# EAGLE board pixelAdapter_f103c8 pro-Panel (EAGLE 9.5.2), part 1 of 2
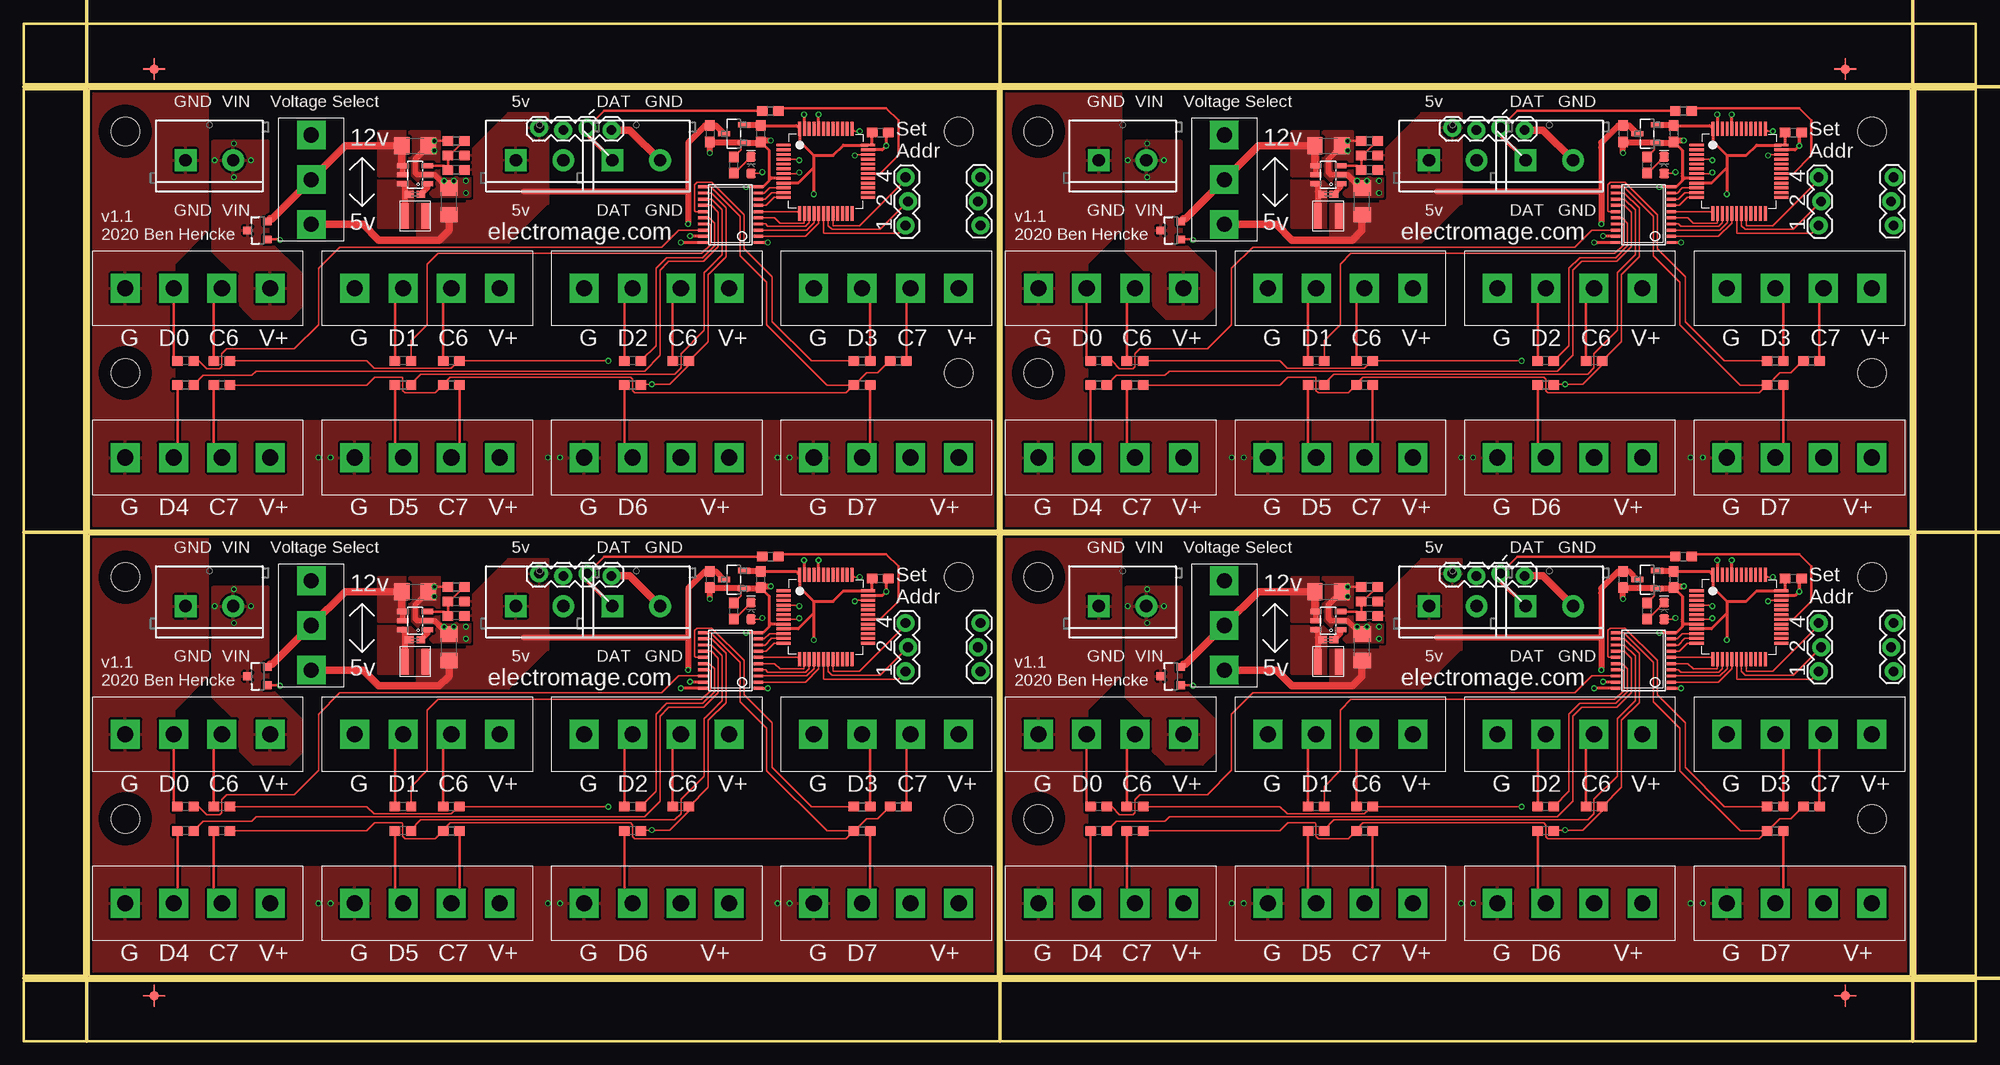
[diagram p0: board, top side]
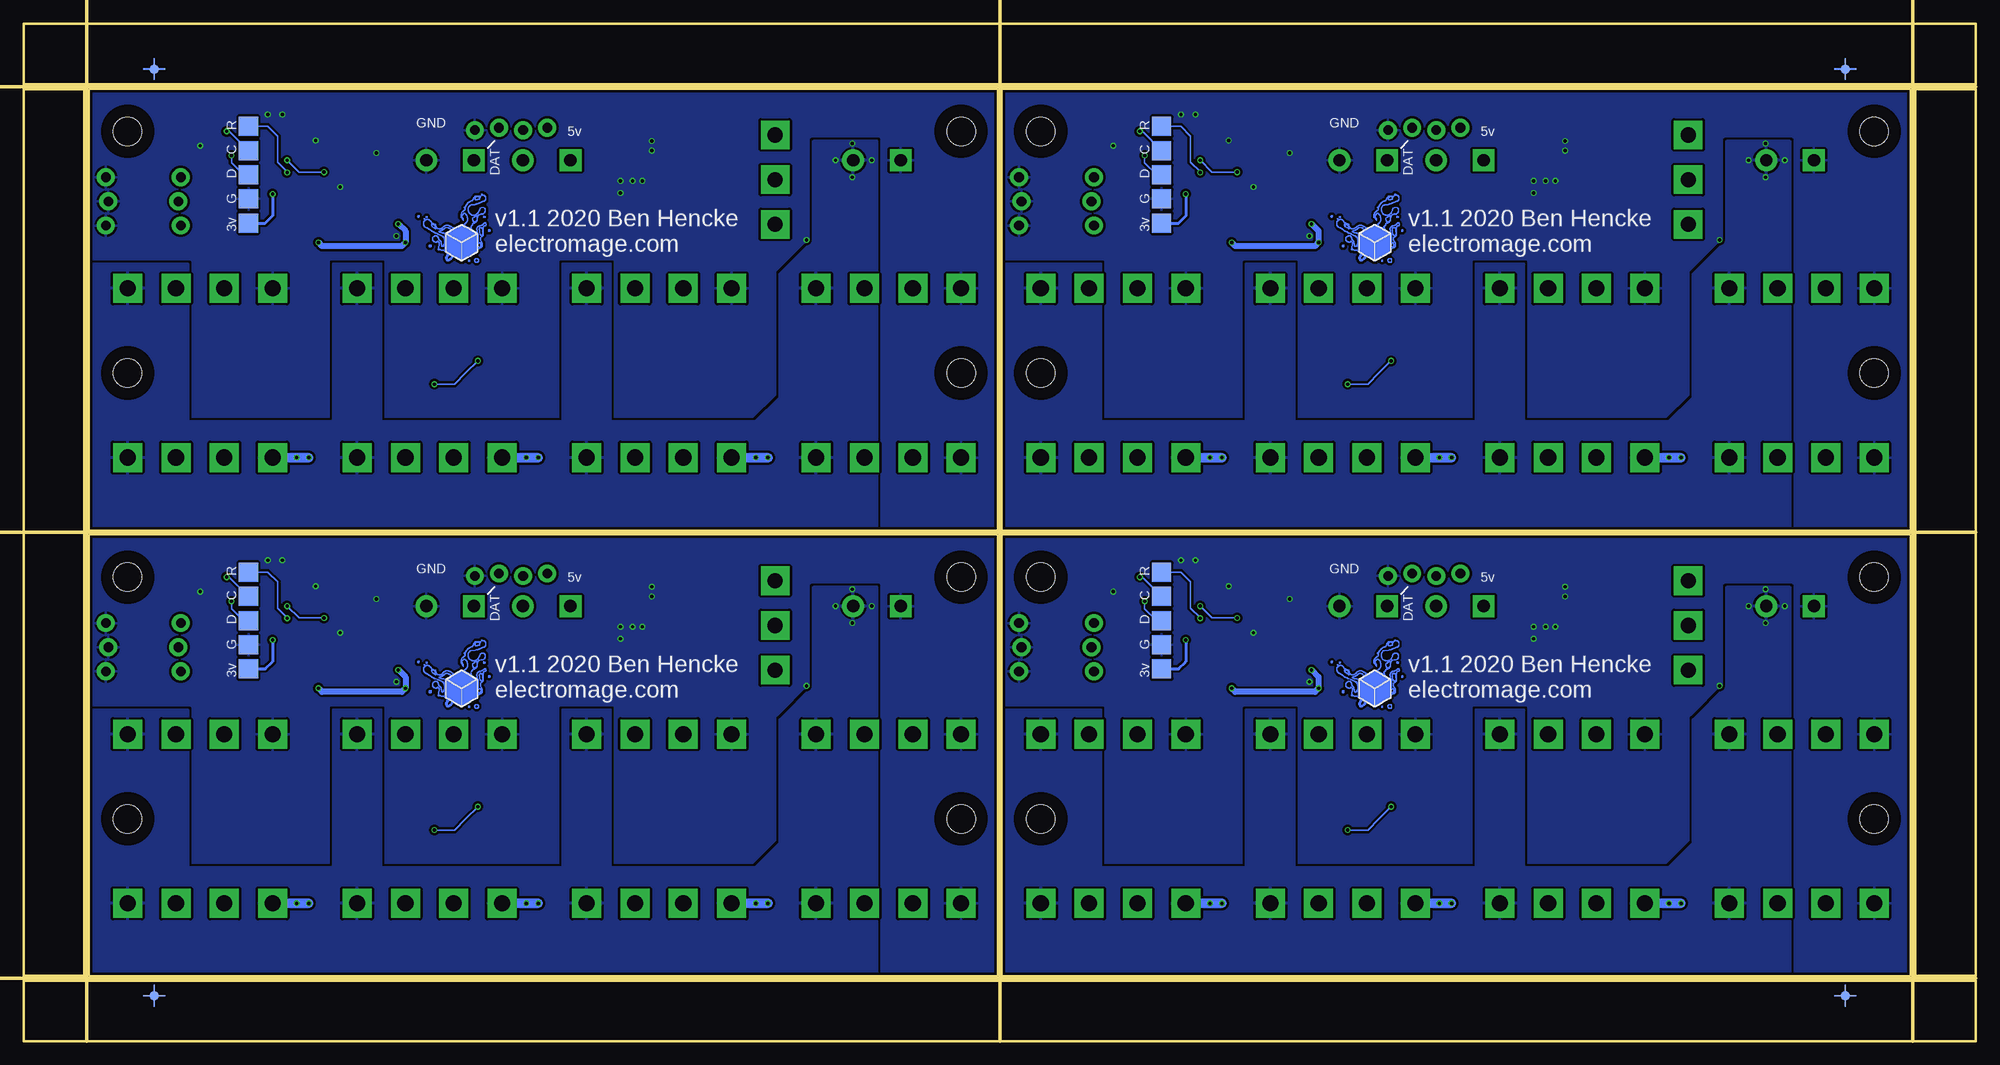
[diagram p1: board, bottom side, seen from below]

Size 205.23 x 106.93 mm. Coordinates in mm from the lower left corner, seen from the top.
Outline: 6.86,6.86 102.36,6.86 102.36,53.21 6.86,53.21 6.86,6.86
Outline: 102.87,6.86 198.37,6.86 198.37,53.21 102.87,53.21 102.87,6.86
Outline: 6.86,53.72 102.36,53.72 102.36,100.08 6.86,100.08 6.86,53.72
Outline: 102.87,53.72 198.37,53.72 198.37,100.08 102.87,100.08 102.87,53.72
Outline: 0,6.35 205.23,6.35 205.23,0 0,0 0,6.35
Outline: 198.88,100.08 205.23,100.08 205.23,6.86 198.88,6.86 198.88,100.08
Outline: 0,106.93 205.23,106.93 205.23,100.58 0,100.58 0,106.93
Outline: 0,100.08 6.35,100.08 6.35,6.86 0,6.86 0,100.08
Copper layers (1*16): Top 0.035mm / dielectric 1.5mm / Bottom 0.035mm
Design rules "SparkFun-2-layer-FAB-LIMIT *": minimum track width 4mil, minimum drill 6mil, track to track 4mil, track to pad 4mil, pad to pad 4mil, via to via 4mil, smd to smd 4mil, copper to edge 4mil, drill to drill 4mil, minimum pad ring 5mil, minimum via ring 5mil, stop-mask expansion 1mil, vias tented up to drill 25mil, thermal gap 10mil
Holes 3 mm at 10.67,23.37 98.3,23.37 10.67,48.77 98.3,48.77 106.68,23.37 194.31,23.37 106.68,48.77 194.31,48.77 10.67,70.23 98.3,70.23 10.67,95.63 98.3,95.63 106.68,70.23 194.31,70.23 106.68,95.63 194.31,95.63
tRestrict: area 9.4,22.1 to 11.9,24.6; area 9.4,47.5 to 11.9,50; area 97,47.5 to 99.6,50; area 97,22.1 to 99.6,24.6; area 105.4,22.1 to 108,24.6; area 105.4,47.5 to 108,50; area 193,47.5 to 195.6,50; area 193,22.1 to 195.6,24.6; area 9.4,69 to 11.9,71.5; area 9.4,94.4 to 11.9,96.9; area 97,94.4 to 99.6,96.9; area 97,69 to 99.6,71.5; 4 more areas
bRestrict: area 9.4,22.1 to 11.9,24.6; area 9.4,47.5 to 11.9,50; area 97,47.5 to 99.6,50; area 97,22.1 to 99.6,24.6; area 105.4,22.1 to 108,24.6; area 105.4,47.5 to 108,50; area 193,47.5 to 195.6,50; area 193,22.1 to 195.6,24.6; area 9.4,69 to 11.9,71.5; area 9.4,94.4 to 11.9,96.9; area 97,94.4 to 99.6,96.9; area 97,69 to 99.6,71.5; 4 more areas
Milling: 6 lines

## Footprints (pad centres in the part's own frame; a part is rotated, then mirrored left to right if it is on the bottom)
0603 = smd 1.1 x 1: 1 -0.85,0; 2 0.85,0
1206 = smd 1.6 x 1.8: 1 -1.4,0; 2 1.4,0
C0402K = smd 0.925 x 0.74: 1 -0.6,0; 2 0.6,0
LED-0603 = smd 1 x 1: A -0.877,0; C 0.877,0
BENSFIDUCIAL-SMALL = smd 1 x 1: 1 0,0 | smd 0.152 x 0.762: P$1 0,0.762; P$2 0,-0.762 | smd 0.762 x 0.152: P$3 0.762,0; P$4 -0.762,0
SCREWTERMINAL-5MM-2 = drill 1.3 pad 2.286 square: 1 0,0 | drill 1.3 pad 2.286: 2 5,0
1X03_LOCK = drill 1.016 pad 1.88: 1 0,0.127; 2 2.54,-0.127; 3 5.08,0.127
1X04_LOCK = drill 1.016 pad 1.88: 1 0,0.127; 2 2.54,-0.127; 3 5.08,0.127; 4 7.62,-0.127
INDUCTOR-3030 = smd 0.8 x 2.7: P$1 1.1,0; P$2 -1.1,0
SOT23-3 = smd 0.8 x 0.9: 1 -0.95,-1; 2 0.95,-1; 3 0,1.1
TP20SQ = smd 2 x 2: TP 0,0
TSSOP20 = smd 0.305 x 0.991: 1 -2.925,-2.918; 2 -2.275,-2.918; 3 -1.625,-2.918; 4 -0.975,-2.918; 5 -0.325,-2.918; 6 0.325,-2.918; 7 0.975,-2.918; 8 1.625,-2.918; 9 2.275,-2.918; 10 2.925,-2.918; 11 2.925,2.918; 12 2.275,2.918; 13 1.625,2.918; 14 0.975,2.918; 15 0.325,2.918; 16 -0.325,2.918; 17 -0.975,2.918; 18 -1.625,2.918; 19 -2.275,2.918; 20 -2.925,2.918
SOT95P237X112-3N = smd 0.559 x 1.27: 1 -0.94,-1.041; 2 0.94,-1.041; 3 0,1.041
LQFP48_7X7MM_0.5MMPP = smd 1.5 x 0.3: 1 -4.45,2.75; 2 -4.45,2.25; 3 -4.45,1.75; 4 -4.45,1.25; 5 -4.45,0.75; 6 -4.45,0.25; 7 -4.45,-0.25; 8 -4.45,-0.75; 9 -4.45,-1.25; 10 -4.45,-1.75; 11 -4.45,-2.25; 12 -4.45,-2.75; 25 4.45,-2.75; 26 4.45,-2.25; 27 4.45,-1.75; 28 4.45,-1.25; 29 4.45,-0.75; 30 4.45,-0.25; 31 4.45,0.25; 32 4.45,0.75; 33 4.45,1.25; 34 4.45,1.75; 35 4.45,2.25; 36 4.45,2.75 | smd 0.3 x 1.5: 13 -2.75,-4.45; 14 -2.25,-4.45; 15 -1.75,-4.45; 16 -1.25,-4.45; 17 -0.75,-4.45; 18 -0.25,-4.45; 19 0.25,-4.45; 20 0.75,-4.45; 21 1.25,-4.45; 22 1.75,-4.45; 23 2.25,-4.45; 24 2.75,-4.45; 37 2.75,4.45; 38 2.25,4.45; 39 1.75,4.45; 40 1.25,4.45; 41 0.75,4.45; 42 0.25,4.45; 43 -0.25,4.45; 44 -0.75,4.45; 45 -1.25,4.45; 46 -1.75,4.45; 47 -2.25,4.45; 48 -2.75,4.45
CON4-508 = drill 1.7 pad 3.048 square: 1 -7.62,0; 2 -2.54,0; 3 2.54,0; 4 7.62,0
SOT23-6 = smd 0.55 x 1.2: 1 -0.95,-1.3; 2 0,-1.3; 3 0.95,-1.3; 4 0.95,1.3; 5 0,1.3; 6 -0.95,1.3
SWITCH-XKB-SS-12D10 = drill 1.6 pad 3 square: P$1 -4.7,0; P$2 0,0; P$3 4.7,0

## Placement (x,y rotation side)
C1  1.0uF  [0603]  72.14,48.51 270 top
C2  4.7uF  [0603]  77.47,48.51 270 top
C3  0.1uF  [0603]  90.04,48.64 0 top
C4  47uF  [1206]  44.7,41.4 90 top
C5  4.7uF  [1206]  41.15,47.24 0 top
C6  0.1uF  [C0402K]  41.15,42.16 180 top
C7  22pF  [0603]  45.47,44.7 180 top
C8  0.1uF  [0603]  186.06,48.64 0 top
C9  4.7uF  [0603]  173.48,48.51 270 top
C10  4.7uF  [1206]  137.16,47.24 0 top
C11  22pF  [0603]  141.48,44.7 180 top
C12  47uF  [1206]  140.72,41.4 90 top
C13  0.1uF  [C0402K]  137.16,42.16 180 top
C14  1.0uF  [0603]  168.15,48.51 270 top
C15  0.1uF  [0603]  90.04,95.5 0 top
C16  4.7uF  [0603]  77.47,95.38 270 top
C17  4.7uF  [1206]  41.15,94.11 0 top
C18  22pF  [0603]  45.47,91.57 180 top
C19  47uF  [1206]  44.7,88.27 90 top
C20  0.1uF  [C0402K]  41.15,89.03 180 top
C21  1.0uF  [0603]  72.14,95.38 270 top
C22  0.1uF  [0603]  186.06,95.5 0 top
C23  4.7uF  [0603]  173.48,95.38 270 top
C24  4.7uF  [1206]  137.16,94.11 0 top
C25  22pF  [0603]  141.48,91.57 180 top
C26  47uF  [1206]  140.72,88.27 90 top
C27  0.1uF  [C0402K]  137.16,89.03 180 top
C28  1.0uF  [0603]  168.15,95.38 270 top
D1  [LED-0603]  172.47,45.21 90 top
D2  [LED-0603]  76.45,45.21 90 top
D3  [LED-0603]  76.45,92.08 90 top
D4  [LED-0603]  172.47,92.08 90 top
E$1  [BENSFIDUCIAL-SMALL]  13.72,102.17 0 top
E$2  [BENSFIDUCIAL-SMALL]  13.72,102.17 0 bottom
E$3  [BENSFIDUCIAL-SMALL]  191.52,102.17 0 top
E$4  [BENSFIDUCIAL-SMALL]  191.52,102.17 0 bottom
E$5  [BENSFIDUCIAL-SMALL]  13.72,4.76 0 top
E$6  [BENSFIDUCIAL-SMALL]  13.72,4.76 0 bottom
E$7  [BENSFIDUCIAL-SMALL]  191.52,4.76 0 top
E$8  [BENSFIDUCIAL-SMALL]  191.52,4.76 0 bottom
J1  [SCREWTERMINAL-5MM-2]  17.02,45.72 0 top
J2  [1X03_LOCK]  92.84,38.86 90 top
J3  [SCREWTERMINAL-5MM-2]  51.74,45.72 0 top
J4  [SCREWTERMINAL-5MM-2]  61.9,45.72 0 top
J5  [1X04_LOCK]  61.8,49.02 180 top
J6  [1X03_LOCK]  100.46,43.94 270 top
J7  [SCREWTERMINAL-5MM-2]  147.75,45.72 0 top
J8  [SCREWTERMINAL-5MM-2]  157.91,45.72 0 top
J9  [1X04_LOCK]  157.81,49.02 180 top
J10  [SCREWTERMINAL-5MM-2]  113.03,45.72 0 top
J11  [1X03_LOCK]  188.85,38.86 90 top
J12  [1X03_LOCK]  196.47,43.94 270 top
J13  [SCREWTERMINAL-5MM-2]  51.74,92.58 0 top
J14  [SCREWTERMINAL-5MM-2]  61.9,92.58 0 top
J15  [1X04_LOCK]  61.8,95.88 180 top
J16  [SCREWTERMINAL-5MM-2]  17.02,92.58 0 top
J17  [1X03_LOCK]  92.84,85.73 90 top
J18  [1X03_LOCK]  100.46,90.81 270 top
J19  [SCREWTERMINAL-5MM-2]  147.75,92.58 0 top
J20  [SCREWTERMINAL-5MM-2]  157.91,92.58 0 top
J21  [1X04_LOCK]  157.81,95.88 180 top
J22  [SCREWTERMINAL-5MM-2]  113.03,92.58 0 top
J23  [1X03_LOCK]  188.85,85.73 90 top
J24  [1X03_LOCK]  196.47,90.81 270 top
L1  INDUCTOR3030  [INDUCTOR-3030]  137.16,39.88 180 top
L2  INDUCTOR3030  [INDUCTOR-3030]  41.15,39.88 180 top
L3  INDUCTOR3030  [INDUCTOR-3030]  41.15,86.74 180 top
L4  INDUCTOR3030  [INDUCTOR-3030]  137.16,86.74 180 top
Q1  2.5A/30V/105mΩ  [SOT23-3]  120.65,38.35 90 top
Q2  2.5A/30V/105mΩ  [SOT23-3]  24.64,85.22 90 top
Q3  2.5A/30V/105mΩ  [SOT23-3]  24.64,38.35 90 top
Q4  2.5A/30V/105mΩ  [SOT23-3]  120.65,85.22 90 top
R1  75  [0603]  17.02,24.64 180 top
R2  75  [0603]  39.88,24.64 180 top
R3  75  [0603]  64.01,24.64 180 top
R4  75  [0603]  88.14,24.64 0 top
R5  75  [0603]  17.02,22.1 180 top
R6  75  [0603]  39.88,22.1 180 top
R7  75  [0603]  64.01,22.1 180 top
R8  75  [0603]  88.14,22.1 0 top
R9  75  [0603]  78.49,50.93 0 top
R10  75  [0603]  74.68,45.21 90 top
R11  100k  [0603]  45.47,46.23 0 top
R12  13.7k  [0603]  45.47,47.75 0 top
R13  75  [0603]  20.83,24.64 180 top
R14  75  [0603]  44.96,24.64 180 top
R15  75  [0603]  69.09,24.64 180 top
R16  75  [0603]  91.95,24.64 0 top
R17  75  [0603]  20.83,22.1 180 top
R18  75  [0603]  44.96,22.1 0 top
R19  75  [0603]  113.03,24.64 180 top
R20  75  [0603]  135.89,24.64 180 top
R21  75  [0603]  160.02,24.64 180 top
R22  75  [0603]  184.15,24.64 0 top
R23  75  [0603]  113.03,22.1 180 top
R24  75  [0603]  135.89,22.1 180 top
R25  75  [0603]  160.02,22.1 180 top
R26  75  [0603]  184.15,22.1 0 top
R27  75  [0603]  170.69,45.21 90 top
R28  75  [0603]  174.5,50.93 0 top
R29  100k  [0603]  141.48,46.23 0 top
R30  13.7k  [0603]  141.48,47.75 0 top
R31  75  [0603]  116.84,24.64 180 top
R32  75  [0603]  140.97,24.64 180 top
R33  75  [0603]  165.1,24.64 180 top
R34  75  [0603]  187.96,24.64 0 top
R35  75  [0603]  116.84,22.1 180 top
R36  75  [0603]  140.97,22.1 0 top
R37  75  [0603]  17.02,71.5 180 top
R38  75  [0603]  39.88,71.5 180 top
R39  75  [0603]  64.01,71.5 180 top
R40  75  [0603]  88.14,71.5 0 top
R41  75  [0603]  17.02,68.96 180 top
R42  75  [0603]  39.88,68.96 180 top
R43  75  [0603]  64.01,68.96 180 top
R44  75  [0603]  88.14,68.96 0 top
R45  75  [0603]  74.68,92.08 90 top
R46  75  [0603]  78.49,97.79 0 top
R47  100k  [0603]  45.47,93.09 0 top
R48  13.7k  [0603]  45.47,94.62 0 top
R49  75  [0603]  20.83,71.5 180 top
R50  75  [0603]  44.96,71.5 180 top
R51  75  [0603]  69.09,71.5 180 top
R52  75  [0603]  91.95,71.5 0 top
R53  75  [0603]  20.83,68.96 180 top
R54  75  [0603]  44.96,68.96 0 top
R55  75  [0603]  113.03,71.5 180 top
R56  75  [0603]  135.89,71.5 180 top
R57  75  [0603]  160.02,71.5 180 top
R58  75  [0603]  184.15,71.5 0 top
R59  75  [0603]  113.03,68.96 180 top
R60  75  [0603]  135.89,68.96 180 top
R61  75  [0603]  160.02,68.96 180 top
R62  75  [0603]  184.15,68.96 0 top
R63  75  [0603]  170.69,92.08 90 top
R64  75  [0603]  174.5,97.79 0 top
R65  100k  [0603]  141.48,93.09 0 top
R66  13.7k  [0603]  141.48,94.62 0 top
R67  75  [0603]  116.84,71.5 180 top
R68  75  [0603]  140.97,71.5 180 top
R69  75  [0603]  165.1,71.5 180 top
R70  75  [0603]  187.96,71.5 0 top
R71  75  [0603]  116.84,68.96 180 top
R72  75  [0603]  140.97,68.96 0 top
TP1  TPTP20SQ  [TP20SQ]  85.6,46.74 0 bottom
TP2  TPTP20SQ  [TP20SQ]  85.6,44.2 0 bottom
TP3  TPTP20SQ  [TP20SQ]  85.6,41.66 0 bottom
TP4  TPTP20SQ  [TP20SQ]  85.6,39.12 0 bottom
TP5  TPTP20SQ  [TP20SQ]  85.6,49.28 180 bottom
TP6  TPTP20SQ  [TP20SQ]  181.61,46.74 0 bottom
TP7  TPTP20SQ  [TP20SQ]  181.61,44.2 0 bottom
TP8  TPTP20SQ  [TP20SQ]  181.61,41.66 0 bottom
TP9  TPTP20SQ  [TP20SQ]  181.61,39.12 0 bottom
TP10  TPTP20SQ  [TP20SQ]  181.61,49.28 180 bottom
TP11  TPTP20SQ  [TP20SQ]  85.6,93.6 0 bottom
TP12  TPTP20SQ  [TP20SQ]  85.6,91.06 0 bottom
TP13  TPTP20SQ  [TP20SQ]  85.6,88.52 0 bottom
TP14  TPTP20SQ  [TP20SQ]  85.6,85.98 0 bottom
TP15  TPTP20SQ  [TP20SQ]  85.6,96.14 180 bottom
TP16  TPTP20SQ  [TP20SQ]  181.61,93.6 0 bottom
TP17  TPTP20SQ  [TP20SQ]  181.61,91.06 0 bottom
TP18  TPTP20SQ  [TP20SQ]  181.61,88.52 0 bottom
TP19  TPTP20SQ  [TP20SQ]  181.61,85.98 0 bottom
TP20  TPTP20SQ  [TP20SQ]  181.61,96.14 180 bottom
U1  SN74HCT245PWR  [TSSOP20]  74.3,40 90 top
U2  AP2120N-3.3TRG1  [SOT95P237X112-3N]  74.68,48.51 90 top
U3  SN74HCT245PWR  [TSSOP20]  170.31,40 90 top
U4  AP2120N-3.3TRG1  [SOT95P237X112-3N]  170.69,48.51 90 top
U5  SN74HCT245PWR  [TSSOP20]  74.3,86.87 90 top
U6  AP2120N-3.3TRG1  [SOT95P237X112-3N]  74.68,95.38 90 top
U7  SN74HCT245PWR  [TSSOP20]  170.31,86.87 90 top
U8  AP2120N-3.3TRG1  [SOT95P237X112-3N]  170.69,95.38 90 top
U$1  STM32F103C8T6  [LQFP48_7X7MM_0.5MMPP]  84.33,44.58 0 top
U$2  CON4-508  [CON4-508]  18.29,32.26 0 top
U$3  CON4-508  [CON4-508]  42.42,32.26 0 top
U$4  SY8120B1ABC  [SOT23-6]  41.15,44.2 90 top
U$5  CON4-508  [CON4-508]  66.55,32.26 0 top
U$6  CON4-508  [CON4-508]  90.68,32.26 0 top
U$7  CON4-508  [CON4-508]  18.29,14.48 0 top
U$8  CON4-508  [CON4-508]  42.42,14.48 0 top
U$9  CON4-508  [CON4-508]  66.55,14.48 0 top
U$10  CON4-508  [CON4-508]  90.68,14.48 0 top
U$11  SWITCH-SPDTXKB-SS-12D10  [SWITCH-XKB-SS-12D10]  30.23,43.69 270 top
U$12  [ELECTRO_MAGE_PCB4_PIXEL_2#PNG]  64.01,38.61 0 bottom
U$13  STM32F103C8T6  [LQFP48_7X7MM_0.5MMPP]  180.34,44.58 0 top
U$14  SY8120B1ABC  [SOT23-6]  137.16,44.2 90 top
U$15  CON4-508  [CON4-508]  114.3,32.26 0 top
U$16  CON4-508  [CON4-508]  138.43,32.26 0 top
U$17  CON4-508  [CON4-508]  162.56,32.26 0 top
U$18  CON4-508  [CON4-508]  186.69,32.26 0 top
U$19  CON4-508  [CON4-508]  114.3,14.48 0 top
U$20  CON4-508  [CON4-508]  138.43,14.48 0 top
U$21  CON4-508  [CON4-508]  162.56,14.48 0 top
U$22  CON4-508  [CON4-508]  186.69,14.48 0 top
U$23  SWITCH-SPDTXKB-SS-12D10  [SWITCH-XKB-SS-12D10]  126.24,43.69 270 top
U$24  [ELECTRO_MAGE_PCB4_PIXEL_2#PNG]  160.02,38.61 0 bottom
U$25  STM32F103C8T6  [LQFP48_7X7MM_0.5MMPP]  84.33,91.44 0 top
U$26  SY8120B1ABC  [SOT23-6]  41.15,91.06 90 top
U$27  CON4-508  [CON4-508]  18.29,79.12 0 top
U$28  CON4-508  [CON4-508]  42.42,79.12 0 top
U$29  CON4-508  [CON4-508]  66.55,79.12 0 top
U$30  CON4-508  [CON4-508]  90.68,79.12 0 top
U$31  CON4-508  [CON4-508]  18.29,61.34 0 top
U$32  CON4-508  [CON4-508]  42.42,61.34 0 top
U$33  CON4-508  [CON4-508]  66.55,61.34 0 top
U$34  CON4-508  [CON4-508]  90.68,61.34 0 top
U$35  SWITCH-SPDTXKB-SS-12D10  [SWITCH-XKB-SS-12D10]  30.23,90.55 270 top
U$36  [ELECTRO_MAGE_PCB4_PIXEL_2#PNG]  64.01,85.47 0 bottom
U$37  STM32F103C8T6  [LQFP48_7X7MM_0.5MMPP]  180.34,91.44 0 top
U$38  SY8120B1ABC  [SOT23-6]  137.16,91.06 90 top
U$39  CON4-508  [CON4-508]  114.3,79.12 0 top
U$40  CON4-508  [CON4-508]  138.43,79.12 0 top
U$41  CON4-508  [CON4-508]  162.56,79.12 0 top
U$42  CON4-508  [CON4-508]  186.69,79.12 0 top
U$43  CON4-508  [CON4-508]  114.3,61.34 0 top
U$44  CON4-508  [CON4-508]  138.43,61.34 0 top
U$45  CON4-508  [CON4-508]  162.56,61.34 0 top
U$46  CON4-508  [CON4-508]  186.69,61.34 0 top
U$47  SWITCH-SPDTXKB-SS-12D10  [SWITCH-XKB-SS-12D10]  126.24,90.55 270 top
U$48  [ELECTRO_MAGE_PCB4_PIXEL_2#PNG]  160.02,85.47 0 bottom

## Library data of the parts
C1 C14 C21 C28 = SparkFun-Capacitors; PROD_ID: CAP-00868
C2 C9 C16 C23 = SparkFun-Capacitors; PROD_ID: CAP-08280
C3 C8 C15 C22 = SparkFun-Capacitors; PROD_ID: CAP-00810
C4 C5 C10 C12 C17 C19 C24 C26 = SparkFun-Capacitors; PROD_ID: CAP-10300
C6 C13 C20 C27 = adafruit
C7 C11 C18 C25 = SparkFun-Capacitors; PROD_ID: CAP-07876
D1-D4 = SparkFun-LED
E$1-E$8 L1-L4 U$2-U$11 U$14-U$23 U$26-U$35 U$38-U$47 = bens
J1 J3 J4 J7 J8 J10 J13 J14 J16 J19 J20 J22 = bens; SF_SKU: PRT-08432
J2 J6 J11 J12 J17 J18 J23 J24 = SparkFun-Connectors
J5 J9 J15 J21 = SparkFun-Connectors; PROD_ID: CONN-09696
Q1-Q4 = SparkFun-DiscreteSemi; PROD_ID: TRANS-11308
R1-R10 R13-R28 R31-R46 R49-R64 R67-R72 = SparkFun-Resistors; PROD_ID: RES-12438
R11 R29 R47 R65 = SparkFun-Resistors; PROD_ID: RES-07828
R12 R30 R48 R66 = SparkFun-Resistors; PROD_ID: RES-08603
TP1-TP20 = testpad
U1 U3 U5 U7 = scanlime
U2 U4 U6 U8 = Microchip_By_element14_Batch_1; MPN: MCP1700T-3302E/TT; OC_FARNELL: 1296592; OC_NEWARK: 88H9817; PACKAGE: SOT23-3; SUPPLIER: Microchip
U$1 U$13 U$25 U$37 = STM32F103C8T6; AVAILABILITY: Unavailable; DESCRIPTION: Mainstream Performance line, ARM Cortex-M3 MCU with 64 Kbytes Flash, 72 MHz CPU, motor control, USB and CAN; MF: STMicroelectronics; MP: STM32F103C8T6; PACKAGE: LQFP-48 STMicroelectronics; PRICE: None
U$12 U$24 U$36 U$48 = Electro_Mage_pcb4_pixel_6

## Nets
+3V1: C8.1 C9.1 TP9.TP U4.2 U$13.9 U$13.36 U$13.48
+3V2: C15.1 C16.1 TP14.TP U6.2 U$25.9 U$25.36 U$25.48
+3V3: C2.1 C3.1 TP4.TP U2.2 U$1.9 U$1.36 U$1.48
+3V4: C22.1 C23.1 TP19.TP U8.2 U$37.9 U$37.36 U$37.48
+5V: C1.1 C4.1 C7.1 J3.1 J5.4 L2.P$2 R11.2 U1.1 U1.20 U2.3 U$11.P$3
+5V1: C11.1 C12.1 C14.1 J7.1 J9.4 L1.P$2 R29.2 U3.1 U3.20 U4.3 U$23.P$3
+5V2: C18.1 C19.1 C21.1 J13.1 J15.4 L3.P$2 R47.2 U5.1 U5.20 U6.3 U$35.P$3
+5V3: C25.1 C26.1 C28.1 J19.1 J21.4 L4.P$2 R65.2 U7.1 U7.20 U8.3 U$47.P$3
ADDR0: J2.1 U$1.18
ADDR1: J2.2 U$1.19
ADDR2: J2.3 U$1.20
ADDR3: J11.1 U$13.18
ADDR4: J11.2 U$13.19
ADDR5: J11.3 U$13.20
ADDR6: J17.1 U$25.18
ADDR7: J17.2 U$25.19
ADDR8: J17.3 U$25.20
ADDR9: J23.1 U$37.18
ADDR10: J23.2 U$37.19
ADDR11: J23.3 U$37.20
CH0: U1.2 U$1.17
CH1: U1.3 U$1.16
CH2: U1.4 U$1.15
CH3: U1.5 U$1.14
CH4: U1.6 U$1.13
CH5: U1.7 U$1.12
CH6: U1.8 U$1.11
CH7: U1.9 U$1.10
CH8: U3.9 U$13.10
CH9: U3.8 U$13.11
CH10: U3.7 U$13.12
CH11: U3.2 U$13.17
CH12: U3.3 U$13.16
CH13: U3.4 U$13.15
CH14: U3.5 U$13.14
CH15: U3.6 U$13.13
CH16: U5.9 U$25.10
CH17: U5.8 U$25.11
CH18: U5.7 U$25.12
CH19: U5.2 U$25.17
CH20: U5.3 U$25.16
CH21: U5.4 U$25.15
CH22: U5.5 U$25.14
CH23: U5.6 U$25.13
CH24: U7.9 U$37.10
CH25: U7.8 U$37.11
CH26: U7.7 U$37.12
CH27: U7.2 U$37.17
CH28: U7.3 U$37.16
CH29: U7.4 U$37.15
CH30: U7.5 U$37.14
CH31: U7.6 U$37.13
GND: C1.2 C2.2 C3.2 C4.2 C5.2 J1.1 J4.2 J5.1 J6.1 J6.2 J6.3 Q3.1 R10.2 R12.1 TP3.TP U1.10 U1.19 U2.1 U$1.8 U$1.35 U$1.44 U$1.47 U$2.1 U$3.1 U$4.2 U$5.1 U$6.1 U$7.1 U$8.1 U$9.1 U$10.1
GND1: C8.2 C9.2 C10.2 C12.2 C14.2 J8.2 J9.1 J10.1 J12.1 J12.2 J12.3 Q1.1 R27.2 R30.1 TP8.TP U3.10 U3.19 U4.1 U$13.8 U$13.35 U$13.44 U$13.47 U$14.2 U$15.1 U$16.1 U$17.1 U$18.1 U$19.1 U$20.1 U$21.1 U$22.1
GND2: C15.2 C16.2 C17.2 C19.2 C21.2 J14.2 J15.1 J16.1 J18.1 J18.2 J18.3 Q2.1 R45.2 R48.1 TP13.TP U5.10 U5.19 U6.1 U$25.8 U$25.35 U$25.44 U$25.47 U$26.2 U$27.1 U$28.1 U$29.1 U$30.1 U$31.1 U$32.1 U$33.1 U$34.1
GND3: C22.2 C23.2 C24.2 C26.2 C28.2 J20.2 J21.1 J22.1 J24.1 J24.2 J24.3 Q4.1 R63.2 R66.1 TP18.TP U7.10 U7.19 U8.1 U$37.8 U$37.35 U$37.44 U$37.47 U$38.2 U$39.1 U$40.1 U$41.1 U$42.1 U$43.1 U$44.1 U$45.1 U$46.1
LED0: R1.2 U$2.2
LED1: R2.2 U$3.2
LED2: R3.2 U$5.2
LED3: R4.2 U$6.2
LED4: R5.2 U$7.2
LED5: R6.2 U$8.2
LED6: R7.2 U$9.2
LED7: R8.2 U$10.2
LED8: R24.2 U$20.2
LED9: R23.2 U$19.2
LED10: R22.2 U$18.2
LED11: R21.2 U$17.2
LED12: R20.2 U$16.2
LED13: R19.2 U$15.2
LED14: R25.2 U$21.2
LED15: R26.2 U$22.2
LED16: R42.2 U$32.2
LED17: R41.2 U$31.2
LED18: R40.2 U$30.2
LED19: R39.2 U$29.2
LED20: R38.2 U$28.2
LED21: R37.2 U$27.2
LED22: R43.2 U$33.2
LED23: R44.2 U$34.2
LED24: R60.2 U$44.2
LED25: R59.2 U$43.2
LED26: R58.2 U$42.2
LED27: R57.2 U$41.2
LED28: R56.2 U$40.2
LED29: R55.2 U$39.2
LED30: R61.2 U$45.2
LED31: R62.2 U$46.2
LEDS0: R1.1 U1.18
LEDS1: R2.1 U1.17
LEDS2: R3.1 U1.16
LEDS3: R4.1 U1.15
LEDS4: R5.1 U1.14
LEDS5: R6.1 U1.13
LEDS6: R7.1 R13.1 R14.1 R15.1 U1.12
LEDS7: R8.1 R16.1 R17.1 R18.1 U1.11
LEDS8: R19.1 U3.18
LEDS9: R20.1 U3.17
LEDS10: R21.1 U3.16
LEDS11: R22.1 U3.15
LEDS12: R23.1 U3.14
LEDS13: R24.1 U3.13
LEDS14: R25.1 R31.1 R32.1 R33.1 U3.12
LEDS15: R26.1 R34.1 R35.1 R36.1 U3.11
LEDS16: R37.1 U5.18
LEDS17: R38.1 U5.17
LEDS18: R39.1 U5.16
LEDS19: R40.1 U5.15
LEDS20: R41.1 U5.14
LEDS21: R42.1 U5.13
LEDS22: R43.1 R49.1 R50.1 R51.1 U5.12
LEDS23: R44.1 R52.1 R53.1 R54.1 U5.11
LEDS24: R55.1 U7.18
LEDS25: R56.1 U7.17
LEDS26: R57.1 U7.16
LEDS27: R58.1 U7.15
LEDS28: R59.1 U7.14
LEDS29: R60.1 U7.13
LEDS30: R61.1 R67.1 R68.1 R69.1 U7.12
LEDS31: R62.1 R70.1 R71.1 R72.1 U7.11
N$1: J4.1 J5.2 R9.1
N$2: D1.C R27.1
N$3: D2.A U$1.4
N$4: J8.1 J9.2 R28.1
N$5: D1.A U$13.4
N$6: R13.2 U$2.3
N$7: R14.2 U$3.3
N$8: C6.1 U$4.1
N$9: C6.2 L2.P$1 U$4.6
N$10: C7.2 R11.1 R12.2 U$4.3
N$11: R15.2 U$5.3
N$12: C13.1 U$14.1
N$13: C13.2 L1.P$1 U$14.6
N$14: C11.2 R29.1 R30.2 U$14.3
N$15: R31.2 U$15.3
N$16: R32.2 U$16.3
N$17: R33.2 U$17.3
N$18: R34.2 U$18.3
N$19: R35.2 U$19.3
N$20: R16.2 U$6.3
N$21: D2.C R10.1
N$22: R17.2 U$7.3
N$23: R18.2 U$8.3
N$24: R36.2 U$20.3
N$25: D3.C R45.1
N$26: J14.1 J15.2 R46.1
N$27: D3.A U$25.4
N$28: C20.1 U$26.1
N$29: C20.2 L3.P$1 U$26.6
N$30: C18.2 R47.1 R48.2 U$26.3
N$31: R49.2 U$27.3
N$32: R50.2 U$28.3
N$33: R51.2 U$29.3
N$34: R52.2 U$30.3
N$35: R53.2 U$31.3
N$36: R54.2 U$32.3
N$37: D4.C R63.1
N$38: J20.1 J21.2 R64.1
N$39: D4.A U$37.4
N$40: C27.1 U$38.1
N$41: C27.2 L4.P$1 U$38.6
N$42: C25.2 R65.1 R66.2 U$38.3
N$43: R67.2 U$39.3
N$44: R68.2 U$40.3
N$45: R69.2 U$41.3
N$46: R70.2 U$42.3
N$47: R71.2 U$43.3
N$48: R72.2 U$44.3
NRST: TP5.TP U$1.7
NRST1: TP10.TP U$13.7
NRST2: TP15.TP U$25.7
NRST3: TP20.TP U$37.7
RX: R9.2 U$1.30
RX1: R28.2 U$13.30
RX2: R46.2 U$25.30
RX3: R64.2 U$37.30
SWCLK: TP1.TP U$1.37
SWCLK1: TP6.TP U$13.37
SWCLK2: TP11.TP U$25.37
SWCLK3: TP16.TP U$37.37
SWDIO: TP2.TP U$1.34
SWDIO1: TP7.TP U$13.34
SWDIO2: TP12.TP U$25.34
SWDIO3: TP17.TP U$37.34
VIN: J1.2 Q3.3 U$2.4 U$3.4 U$5.4 U$6.4 U$7.4 U$8.4 U$9.4 U$10.4
VIN1: C5.1 Q3.2 U$4.4 U$4.5 U$11.P$2
VIN2: J10.2 Q1.3 U$15.4 U$16.4 U$17.4 U$18.4 U$19.4 U$20.4 U$21.4 U$22.4
VIN3: C10.1 Q1.2 U$14.4 U$14.5 U$23.P$2
VIN4: J16.2 Q2.3 U$27.4 U$28.4 U$29.4 U$30.4 U$31.4 U$32.4 U$33.4 U$34.4
VIN5: C17.1 Q2.2 U$26.4 U$26.5 U$35.P$2
VIN6: J22.2 Q4.3 U$39.4 U$40.4 U$41.4 U$42.4 U$43.4 U$44.4 U$45.4 U$46.4
VIN7: C24.1 Q4.2 U$38.4 U$38.5 U$47.P$2